# Altium PCB uStepper.PcbDoc (part 1 of 2)
Units mm, origin at the board's own origin, x right, y up, seen from the top; angles counter-clockwise.
Board outline 41.8 x 41.8 mm, 4 copper layers (Top Layer, GND, Vcc, Bottom Layer), stack 1.62 mm thick; 84 components, 62 nets, 292 pads, 387 vias.
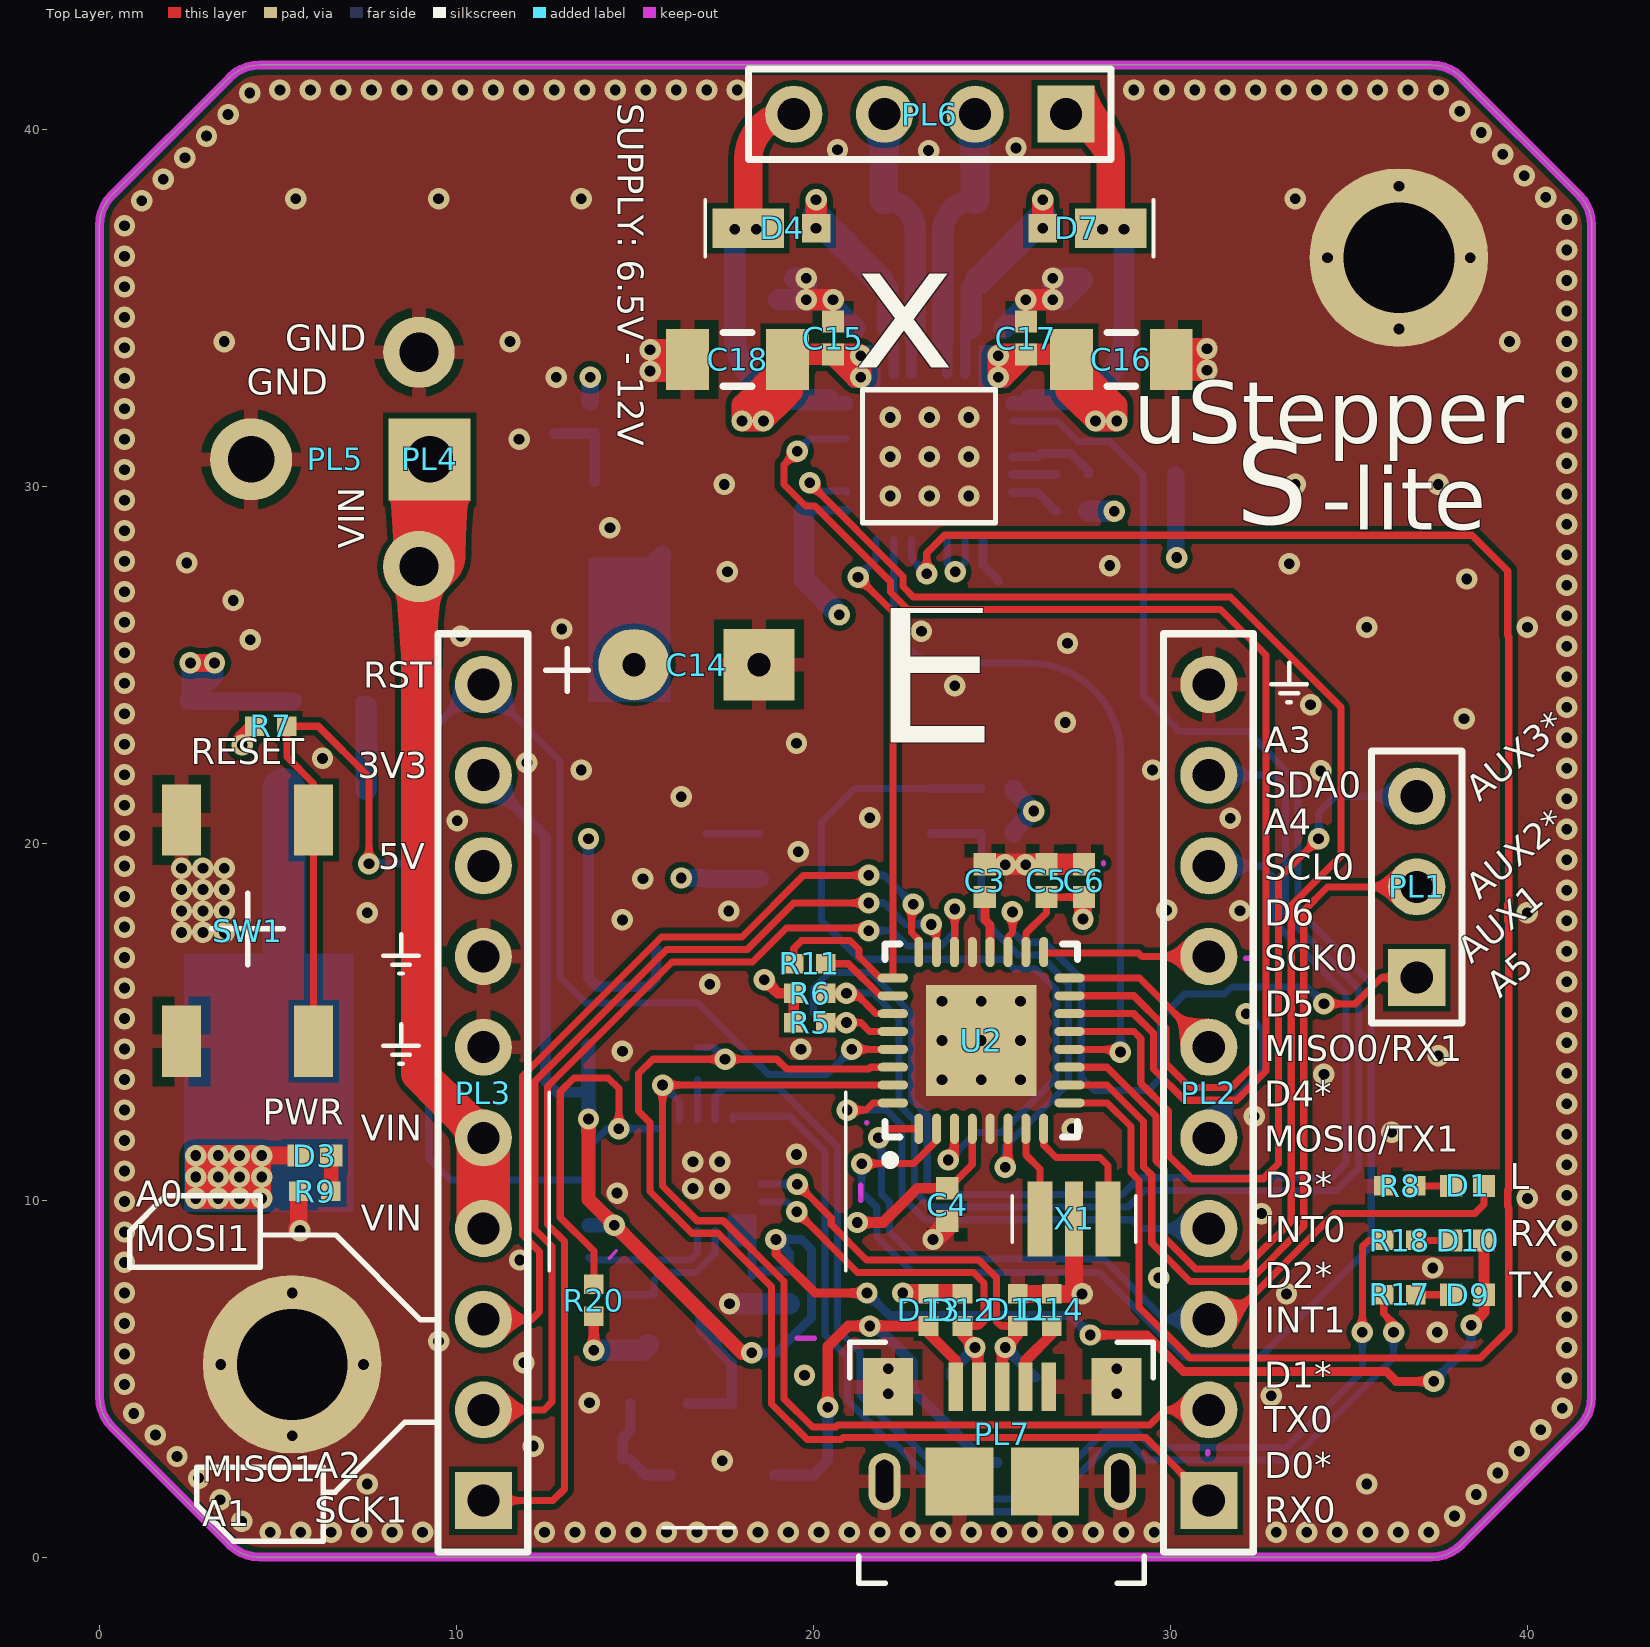
[diagram p0: Top Layer view]
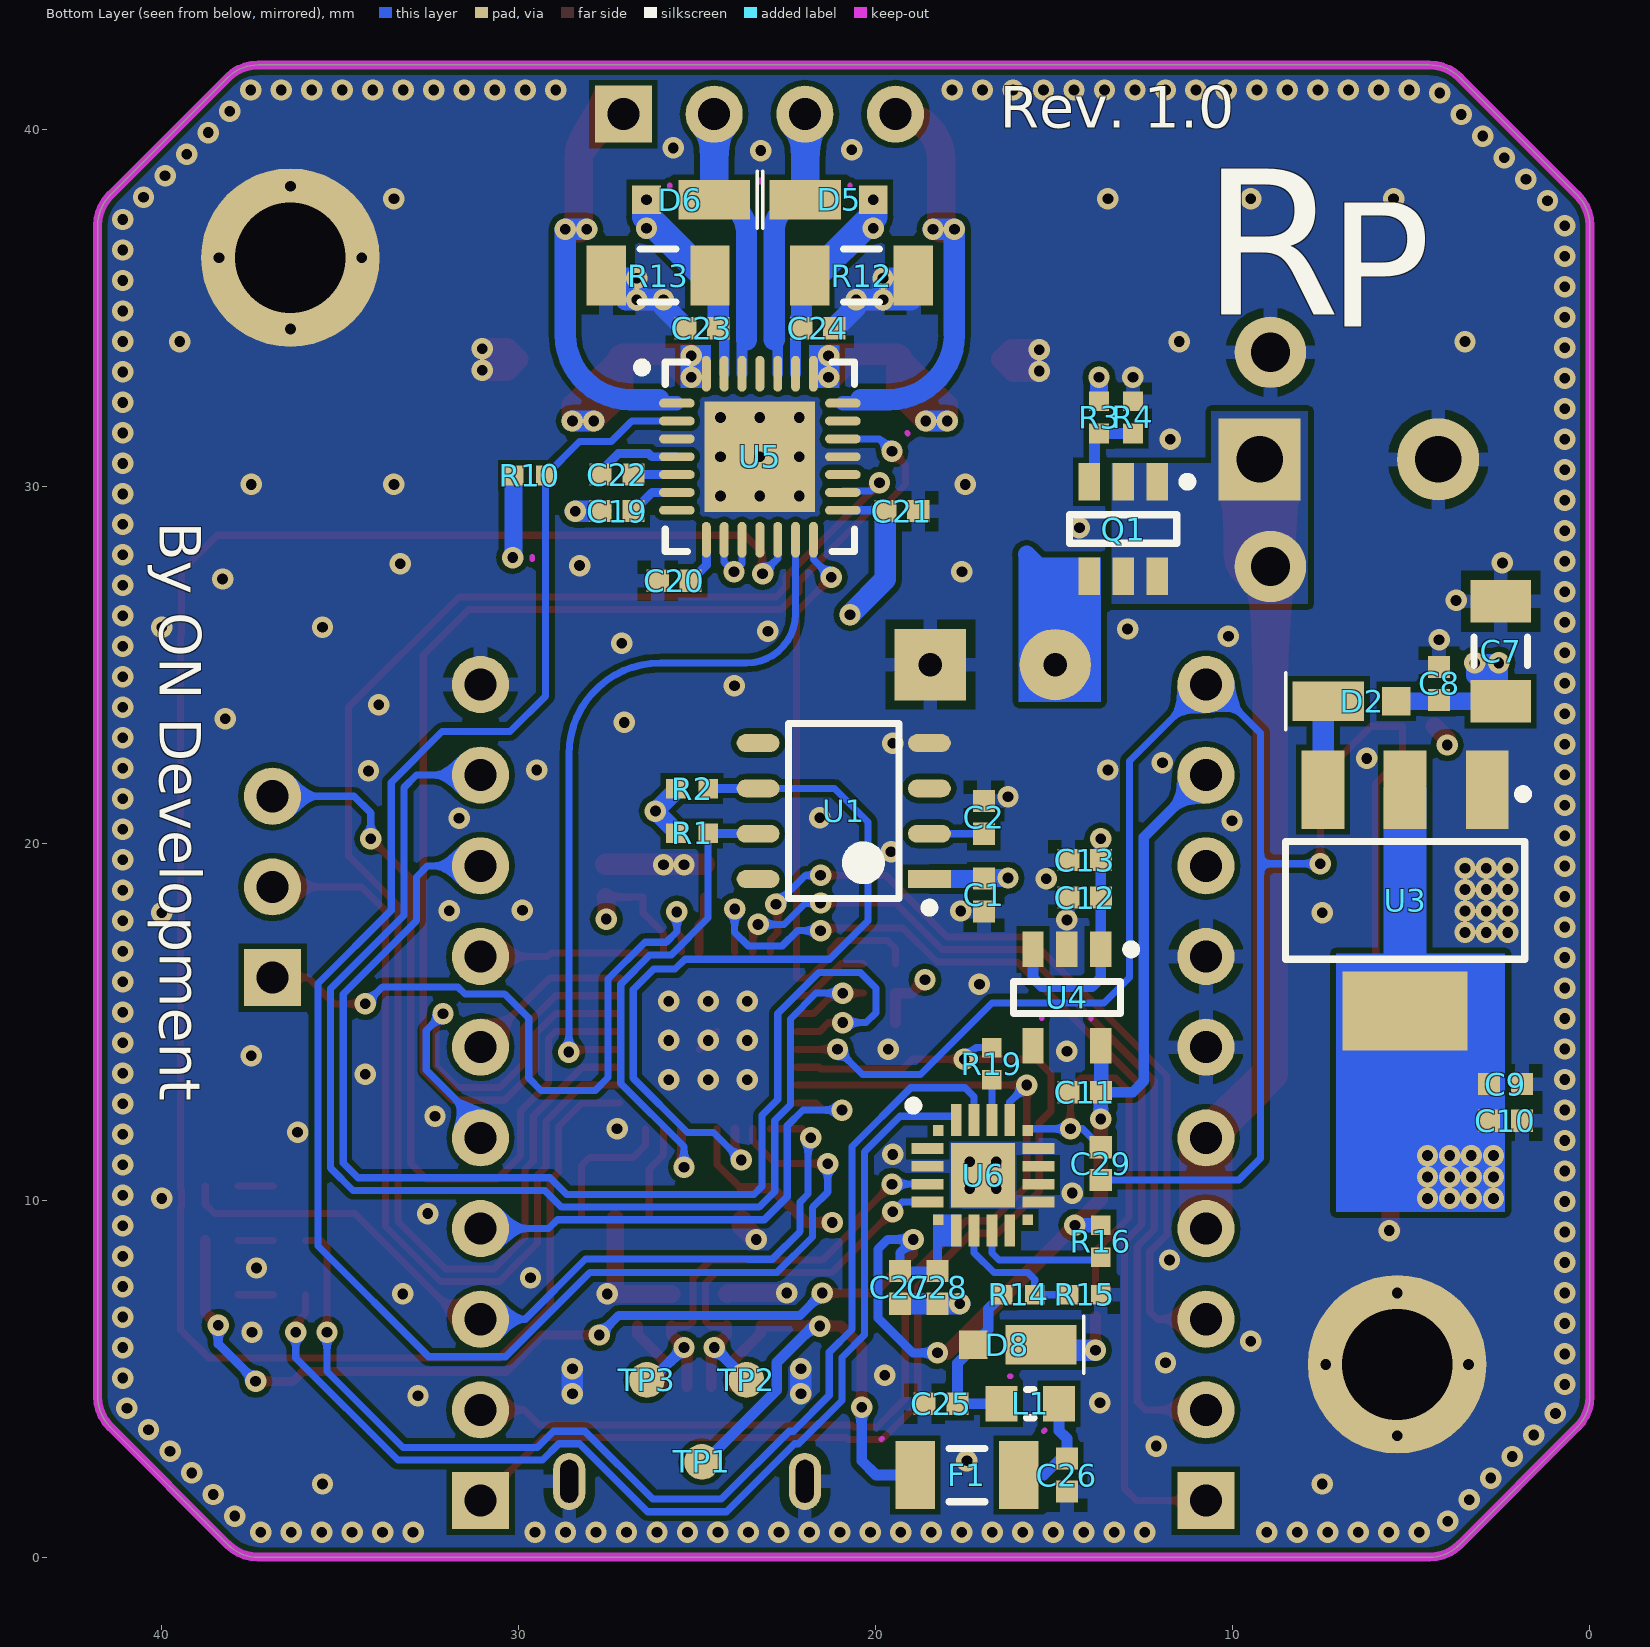
[diagram p1: Bottom Layer view, seen from below]
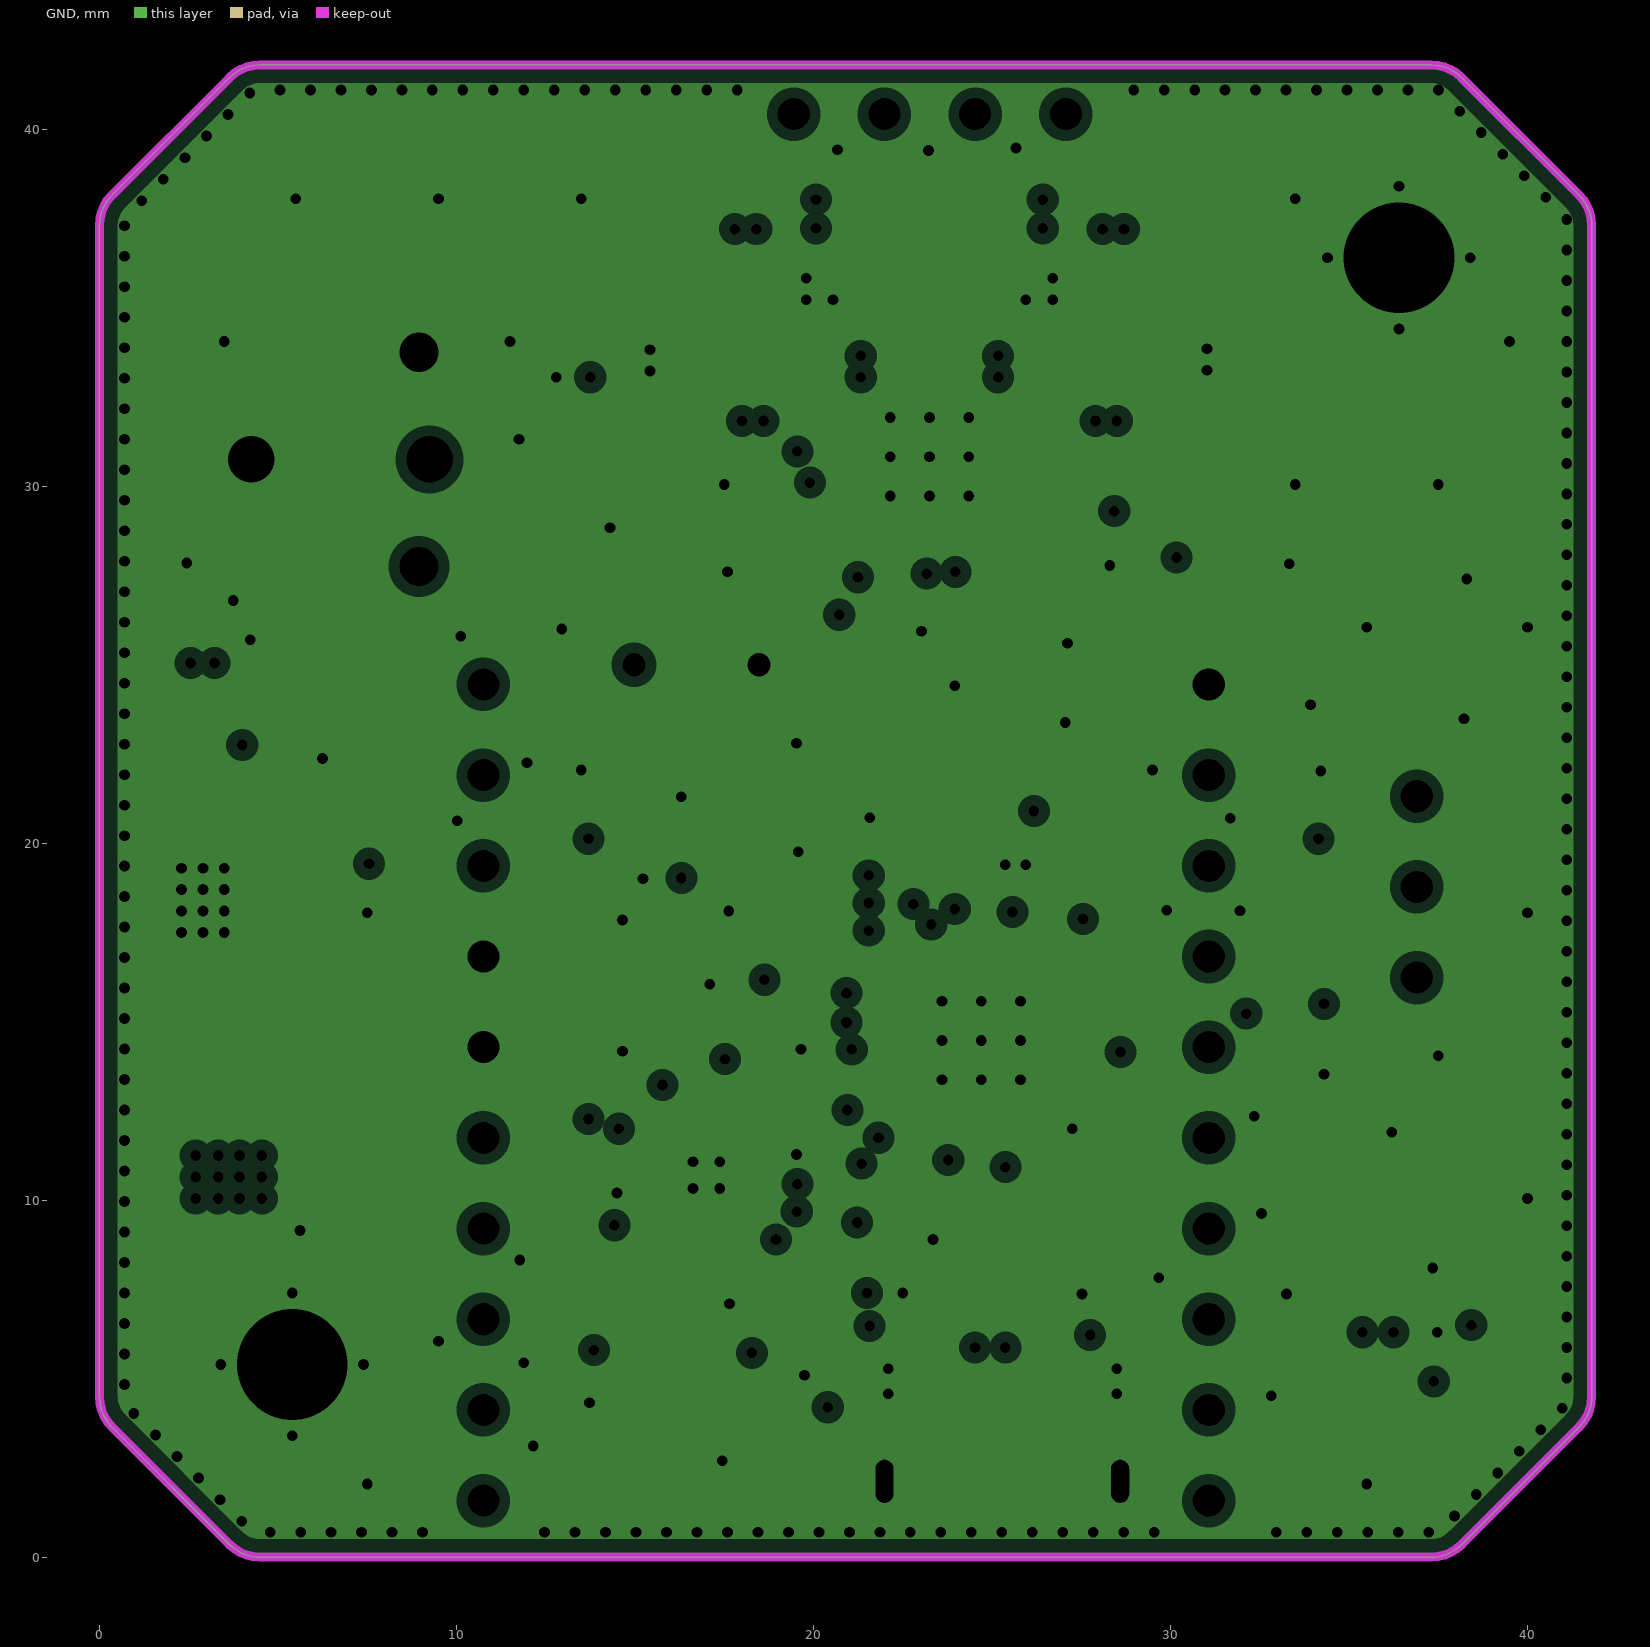
[diagram p2: GND, clearances drawn from the general rule]
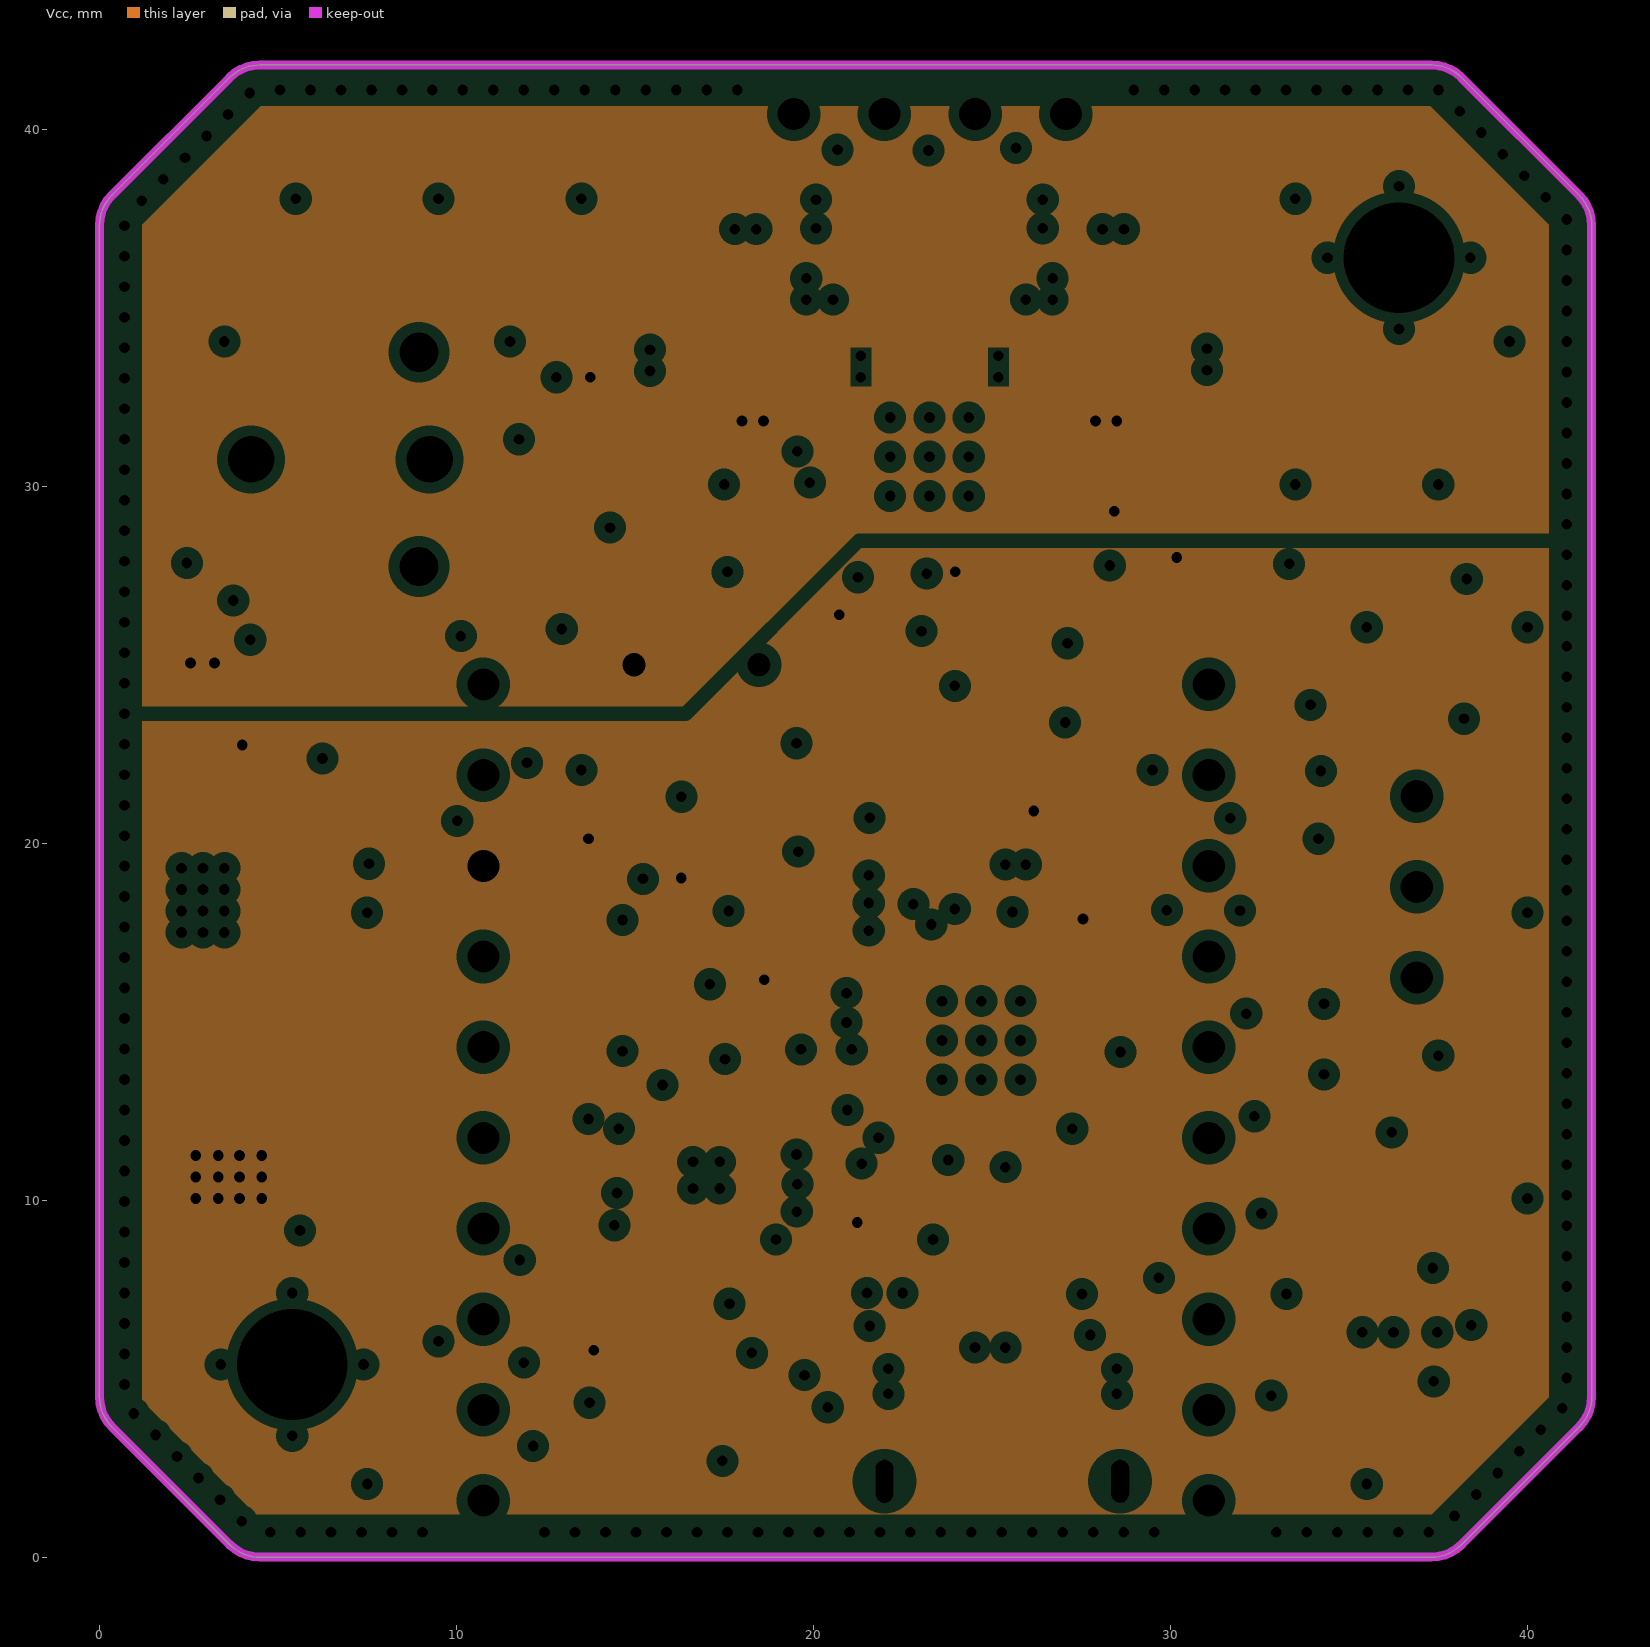
[diagram p3: Vcc, clearances drawn from the general rule]
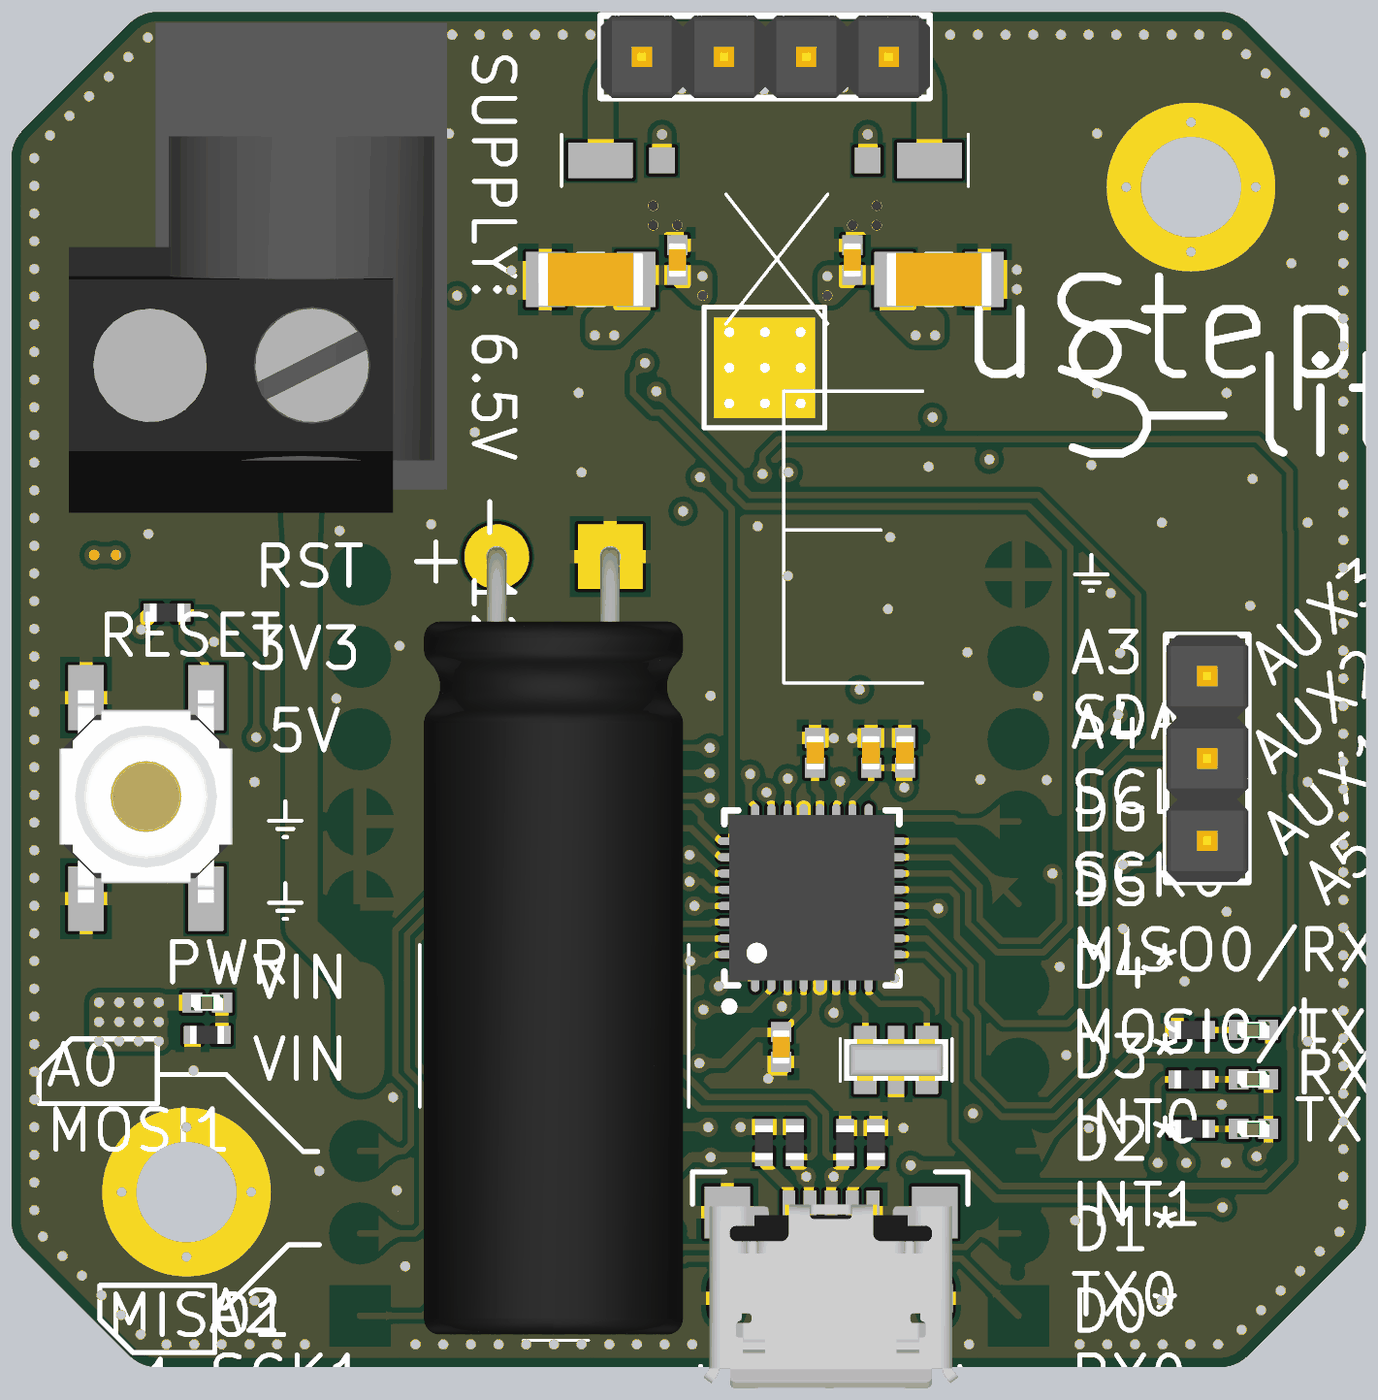
[diagram p5: 3D render of the assembled board from above, using the file's embedded part models]
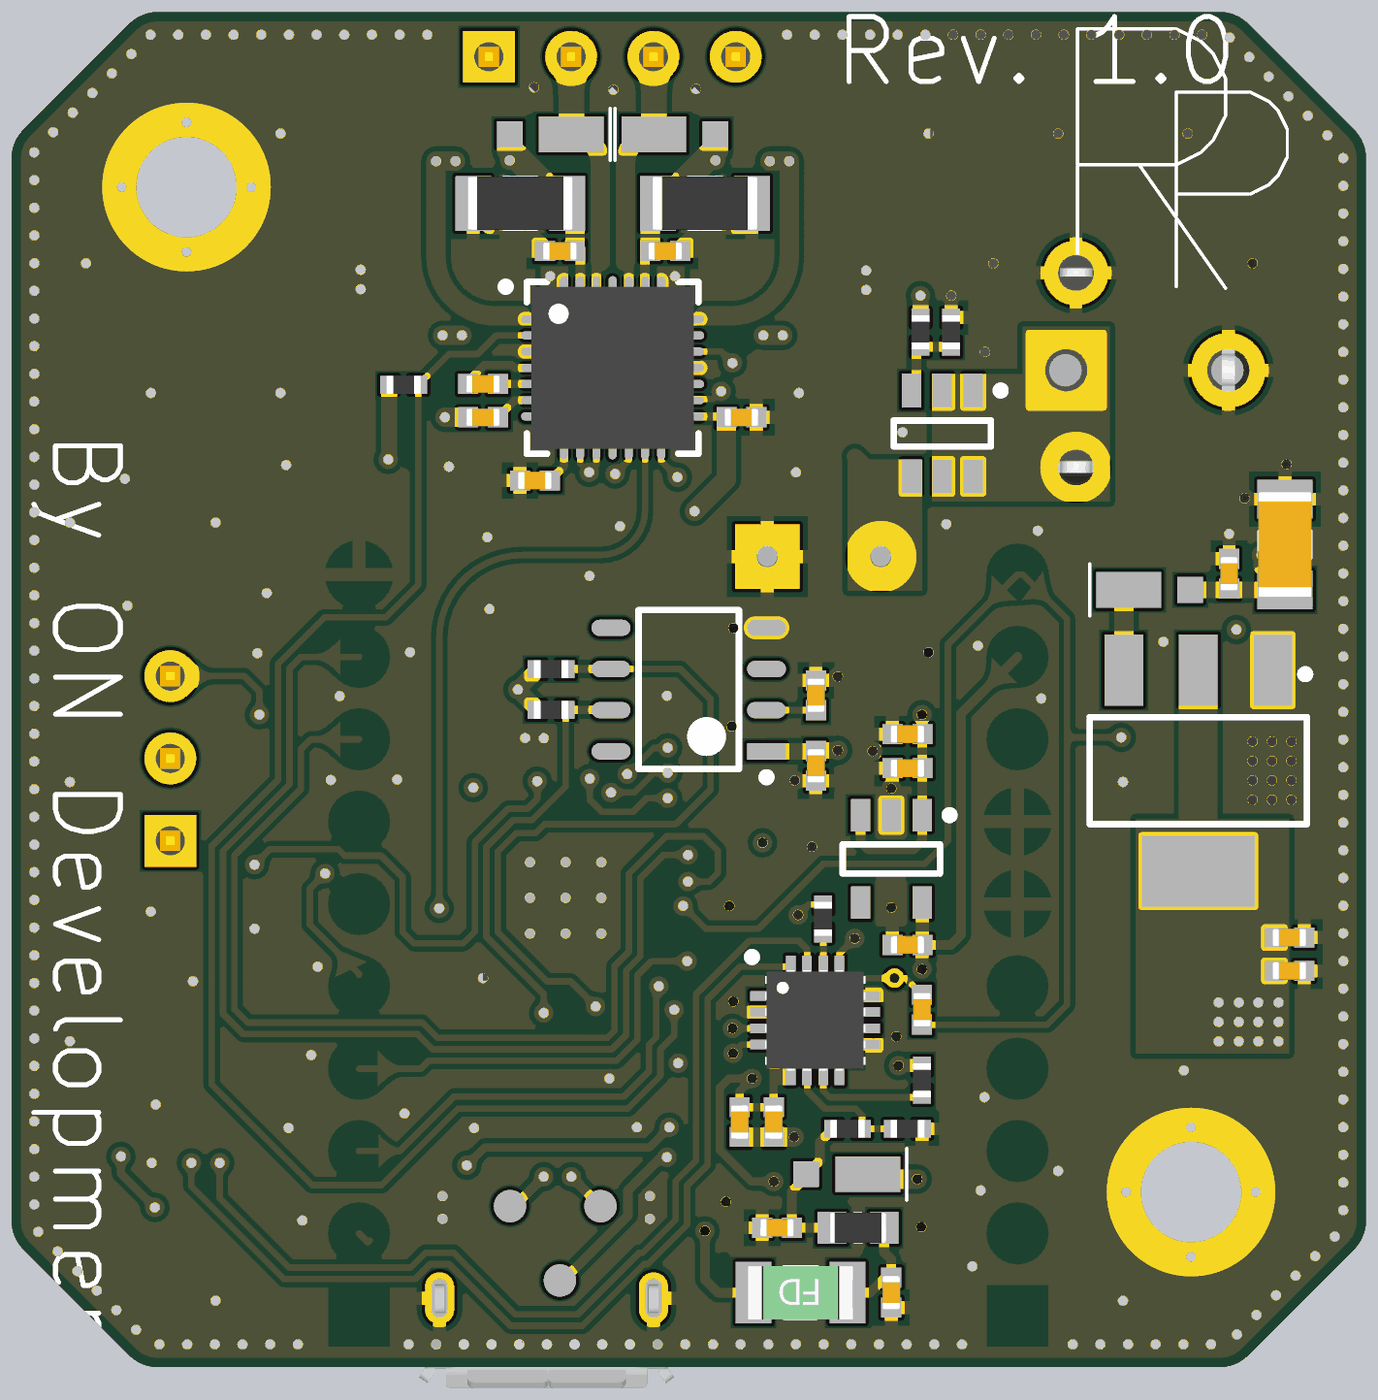
[diagram p6: 3D render of the assembled board from below, using the file's embedded part models]

## Layer stack, top to bottom
Top Solder: solder mask 0.01, Solder Resist, Dk 3.5
Top Layer: signal copper 0.035
Dielectric 1: prepreg 0.24, 2x2116, Dk 4.2
GND: plane copper 0.035, net GND
Dielectric 3: core 1, Dk 4.2
Vcc: plane copper 0.035, net (Multiple Nets)
Dielectric 4: prepreg 0.24, 2x2116, Dk 4.2
Bottom Layer: signal copper 0.035
Bottom Solder: solder mask 0.01, Solder Resist, Dk 3.5

## Board outline
0.349,3.65 3.651,0.348 ccw(c4.5,1.206) 4.494,-0.001 37.306,-0.001 ccw(c37.3,1.206) 38.149,0.348 41.451,3.65 ccw(c40.593,4.499) 41.8,4.499 41.8,37.299 ccw(c40.593,37.299) 41.446,38.153 38.154,41.446 ccw(c37.3,40.592) 37.3,41.799 4.5,41.799 ccw(c4.5,40.592) 3.646,41.446 0.354,38.153 ccw(c1.207,37.299) 0,37.299 0,4.499 ccw(c1.207,4.499)

## Design rules (kind name [scope] priority, off if disabled: settings)
AssemblyTestPointUsage SilkToBoardRegionClearance_1 [All] p2:
BoardOutlineClearance [All] p1: gap=0.25 ignorepadtopadclearanceinfootprint=FALSE
Clearance Board_edge [( OnLayer('Vcc') OR OnLayer('GND')) vs OnLayer('Keep-Out Layer')] p1: gap=0.25 ignorepadtopadclearanceinfootprint=FALSE
Clearance Clearance_Inner [(OnLayer('Vcc') OR OnLayer('GND'))] p2: gap=0.254 ignorepadtopadclearanceinfootprint=FALSE except(0: Arc-Hole Track-Hole SMDPad-Hole THPad-Hole Via-Hole Fill-Hole Poly-Hole Region-Hole Text-Hole)
Clearance [All] p3: gap=0.152 ignorepadtopadclearanceinfootprint=FALSE except(0: Arc-Hole Track-Hole SMDPad-Hole THPad-Hole Via-Hole Fill-Hole Poly-Hole Region-Hole Text-Hole)
ComponentClearance [All] p1: gap=-100 collisioncheckmode=3 verticalgap=0.254 showdistances=FALSE
DiffPairsRouting [All] p1: maxlimit=0.153 minlimit=0.153 mostfreqgap=0.153 toplayer_minwidth=0.2 toplayer_maxwidth=0.5 toplayer_prefwidth=0.275 bottomlayer_minwidth=0.2 bottomlayer_maxwidth=0.5 bottomlayer_prefwidth=0.275 maxuncoupledlength=12.7
HoleSize [All] p1: absolutevalues=TRUE maxlimit=6.35 minlimit=0.3 maxpercent=80.000 minpercent=20.000
MatchedLengths DiffPair_DIFF100MatchedLengths [InDifferentialPairClass('DIFF100')] p1: tolerance=0.152 checknetsindiffpair=TRUE checkdiffpairvsdiffpair=FALSE checkxsignals=FALSE checkothers=FALSE
MinimumAnnularRing MinimumAnnularRing_1 [All] p1: minimumring=0.145
MinimumSolderMaskSliver "SMT min Solder Mask Width" [All] p1 off: minsoldermaskwidth=0.13
PlaneClearance [All] p1: clearance=0.3
PlaneConnect Via [isVia] p1: planeconnectstyle=Direct reliefexpansion=0.508 reliefentries=4 reliefconductorwidth=0.254 reliefairgap=0.254
PlaneConnect VINPROTECT [InNet('VIN_PROTECT')] p2: planeconnectstyle=Relief reliefexpansion=0.508 reliefentries=4 reliefconductorwidth=0.5 reliefairgap=0.254
PlaneConnect [(InComponentClass('All Components'))] p3: planeconnectstyle=Relief reliefexpansion=0.508 reliefentries=4 reliefconductorwidth=0.5 reliefairgap=0.254
PlaneConnect "Corner pads" [All] p4: planeconnectstyle=Direct reliefexpansion=0.508 reliefentries=4 reliefconductorwidth=0.254 reliefairgap=0.254
PolygonConnect PolygonConnect_VIN [InNet('VIN')] p1: thpad.connectstyle=Direct thpad.reliefconductorwidth=1.75 thpad.reliefentries=4 thpad.polygonreliefangle="90 Angle" thpad.airgapwidth=0.35 smdpad.connectstyle=Direct smdpad.reliefconductorwidth=0.254 smdpad.reliefentries=4 smdpad.polygonreliefangle="90 Angle" smdpad.airgapwidth=0.254 via.connectstyle=Relief via.reliefconductorwidth=0.254 via.reliefentries=4 via.polygonreliefangle="90 Angle" via.airgapwidth=0.254
PolygonConnect PolygonConnect_IC [(InComponent('U1') OR InComponent('U2') OR InComponent('U3') OR InComponent('U4') OR InComponent('U5') OR InComponent('U6'))] p2: connectstyle=Direct reliefconductorwidth=0.254 reliefentries=4 polygonreliefangle="90 Angle" airgapwidth=0.254
PolygonConnect PolygonConnect_Via [IsVia] p3: connectstyle=Direct reliefconductorwidth=0.254 reliefentries=4 polygonreliefangle="90 Angle" airgapwidth=0.254
PolygonConnect [(InComponentClass('All Components'))] p4: connectstyle=Relief reliefconductorwidth=0.4 reliefentries=4 polygonreliefangle="90 Angle" airgapwidth=0.254
PolygonConnect "GND corner pads" [All] p5: connectstyle=Direct reliefconductorwidth=0.254 reliefentries=4 polygonreliefangle="90 Angle" airgapwidth=0.254
RoutingVias [All] p1: holewidth=0.3 width=0.6 viastyle="Through Hole" minholewidth=0.3 minwidth=0.4 maxholewidth=5 maxwidth=10
SilkToBoardRegionClearance SilkToBoardRegionClearance_1_1 [All] p1:
SilkToBoardRegionClearance [All] p2:
SilkToSilkClearance [All] p1 off: silktosilkclearance=0.254
SilkToSolderMaskClearance SilkToSolderMaskClearance_1_1 [IsPad] p1: minsilkscreentomaskgap=0.178 clearancetoexposedcopper=TRUE
SolderMaskExpansion [All] p1: expansion=0.102
Width [All] p1: maxlimit=2.54 minlimit=0.152 preferedwidth=0.2
21 further rules are at their usual default settings.

## Classes and differential pairs
component class U_USB: C25 C26 C27 C28 C29 D8 D9 D10 D11 D12 D13 D14 F1 L1 LD2 LD3 PL7 R14 R15 R16 R17 R18 R19 R20 TP1 TP2 TP3 U6
component class U_Stepper_control: C14 C15 C16 C17 C18 C19 C20 C21 C22 C23 C24 C? D4 D5 D6 D7 PL6 R10 R11 R12 R13 U5
component class U_Power: C7 C8 C9 C10 C11 C12 C13 D2 D3 LD4 R9 U3 U4
component class U_MCU+IO: C3 C4 C5 C6 D1 LD1 R5 R6 R7 R8 SW1 U2 X1
component class U_encoder: C1 C2 R1 R2 U1
component class Main: PL1 PL2 PL3 PL4 PL5 Q1 R3 R4
differential pair USB: +USB_P -USB_N

## Components (designator, comment, footprint, x,y, rotation, side; value= is the part's Value field where it differs from the comment)
C1 "0.1 uF 0402 25V" CAP_0402 16.975,18.549 r90 bottom value="0.1 uF"
C2 "1uF 0402 10V" CAP_0402 16.975,20.724 r270 bottom value="1 uF"
C3 "0.1 uF 0402 25V" CAP_0402 24.8,18.949 r270 top value="0.1 uF"
C4 "0.1 uF 0402 25V" CAP_0402 23.75,9.874 r270 top value="0.1 uF"
C5 "0.1 uF 0402 25V" CAP_0402 26.525,18.949 r270 top value="0.1 uF"
C6 "1uF 0402 10V" CAP_0402 27.575,18.95 r270 top value="1 uF"
C7 "10uF 1206 50V" CAP_1206 2.5,25.374 r270 bottom value=10uF
C8 "0.1 uF 0402 25V" CAP_0402 4.225,24.474 r270 bottom value="0.1 uF"
C9 "0.1 uF 0402 25V" CAP_0402 2.365,13.249 r0 bottom value="0.1 uF"
C10 "10uF 0402 6V3" CAP_0402 2.365,12.224 r0 bottom value=10uF
C11 "1uF 0402 10V" CAP_0402 14.15,13.024 r180 bottom value="1 uF"
C12 "0.1 uF 0402 25V" CAP_0402 14.15,18.474 r180 bottom value="0.1 uF"
C13 "1uF 0402 10V" CAP_0402 14.15,19.524 r180 bottom value="1 uF"
C14 "180uF 50V" "Capacitor 8x22" 16.725,24.999 r180 top locked value=180uF
C15 "0.1 uF 0402 25V" CAP_0402 20.55,34.149 r270 top value="0.1 uF"
C16 "10uF 1206 50V" CAP_1206 28.625,33.549 r0 top value=10uF
C17 "0.1 uF 0402 25V" CAP_0402 25.95,34.149 r270 top value="0.1 uF"
C18 "10uF 1206 50V" CAP_1206 17.875,33.549 r180 top value=10uF
C19 "0.1 uF 0402 25V" CAP_0402 27.25,29.299 r180 bottom value="0.1 uF"
C20 "10uF 0402 6V3" CAP_0402 25.65,27.349 r180 bottom value=10uF
C21 "0.1 uF 0402 25V" CAP_0402 19.275,29.299 r0 bottom value="0.1 uF"
C22 "22nF 0402 50V" CAP_0402 27.25,30.324 r180 bottom value=22nF
C23 "0.1 uF 0402 25V" CAP_0402 24.875,34.424 r180 bottom value="0.1 uF"
C24 "0.1 uF 0402 25V" CAP_0402 21.625,34.424 r0 bottom value="0.1 uF"
C25 "10uF 0402 6V3" CAP_0402 18.175,4.299 r180 bottom value=10uF
C26 "0.1 uF 0402 25V" CAP_0402 14.65,2.299 r90 bottom value="0.1 uF"
C27 "10uF 0402 6V3" CAP_0402 19.327,7.559 r90 bottom value=10uF
C28 "0.1 uF 0402 25V" CAP_0402 18.277,7.559 r90 bottom value="0.1 uF"
C29 "0.1 uF 0402 25V" CAP_0402 13.7,11.024 r270 bottom value="0.1 uF"
D1 "GREEN LED" "0402 LED" 38.325,10.399 r180 top
D2 "V2P6-M3/H" MicroSMP 6.725,23.974 r180 bottom
D3 "GREEN LED" "0402 LED" 6.035,11.249 r0 top
D4 "V2P6-M3/H" MicroSMP 18.775,37.224 r0 top
D5 "V2P6-M3/H" MicroSMP 21.375,38.024 r180 bottom
D6 "V2P6-M3/H" MicroSMP 25.125,38.024 r0 bottom
D7 "V2P6-M3/H" MicroSMP 27.725,37.224 r180 top
D8 "V2P6-M3/H" MicroSMP 15.975,5.949 r0 bottom
D9 "GREEN LED" "0402 LED" 38.325,7.349 r180 top
D10 "GREEN LED" "0402 LED" 38.325,8.874 r180 top
D11 "TVS" RES_0402 25.725,6.924 r270 top
D12 "TVS" RES_0402 24.175,6.924 r270 top
D13 "TVS" RES_0402 23.225,6.924 r270 top
D14 "TVS" RES_0402 26.675,6.924 r270 top
F1 "PTC 250mA Hold" "PTC Fuse 1206" 17.45,2.299 r0 bottom
L1 "180 Ohms @ 100MHz" IND_0603 15.675,4.299 r180 bottom value="180 Ohm"
PL1 "3-pin 2.54mm" "3-pin 2.54mm header" 36.9,18.774 r90 top locked
PL2 "2.54mm" "10-pin female 2.54mm" 35.52,-7.559 r90 top locked
PL3 "2.54mm" "10-pin female 2.54mm" 15.2,-7.559 r90 top locked
PL4 "2pin Terminal block 5.08mm" "5mm header" 6.75,30.749 r180 top
PL5 "PJ-102AH" PJ-102AH 6.6,30.749 r270 top locked
PL6 "2.54mm" "4-pin 2.54mm header" 23.26,40.419 r180 top locked
PL7 "Micro USB" "10118193-0001LF Micro USB" 25.29,3.449 r0 top locked
Q1 "CPH6354" SOT95P280X95-6N 13.075,28.799 r270 bottom
R1 "4k7 0402" RES_0402 25.15,20.274 r0 bottom value=4k7
R2 "4k7 0402" RES_0402 25.15,21.524 r0 bottom value=4k7
R3 "10k 0402" RES_0402 13.75,31.924 r90 bottom value=10k
R4 "4k7 0402" RES_0402 12.8,31.924 r270 bottom value=4k7
R5 "4k7 0402" RES_0402 19.9,14.974 r180 top value=4k7
R6 "4k7 0402" RES_0402 19.9,15.799 r180 top value=4k7
R7 "10k 0402" RES_0402 4.8,23.274 r180 top value=10k
R8 "47k 0402" RES_0402 36.425,10.399 r0 top value=47k
R9 "47k 0402" RES_0402 6.035,10.249 r0 top value=47k
R10 "10k 0402" RES_0402 29.7,30.299 r0 bottom value=10k
R11 "1k 0402" RES_0402 19.9,16.624 r0 top value=1k
R12 "0R15" RES_1206 20.4,35.899 r0 bottom
R13 "0R15" RES_1206 26.1,35.899 r180 bottom
R14 "22k 0402" RES_0402 16,7.349 r0 bottom value=22k
R15 "47k 0402" RES_0402 14.15,7.349 r0 bottom value=47k
R16 "1k 0402" RES_0402 13.7,8.849 r90 bottom value=1k
R17 "47k 0402" RES_0402 36.425,7.349 r180 top value=47k
R18 "47k 0402" RES_0402 36.425,8.874 r180 top value=47k
R19 "4k7 0402" RES_0402 16.75,13.824 r90 bottom value=4k7
R20 "10k 0402" RES_0402 13.85,7.199 r270 top value=10k
SW1 "TACTB-64K-F" TACTB-64K-F 4.15,17.549 r270 top
TP1 "TestPoint" 1x0mm 24.877,2.673 r90 bottom locked
TP2 "TestPoint" 1x0mm 23.625,4.965 r90 bottom locked
TP3 "TestPoint" 1x0mm 26.416,4.965 r90 bottom locked
U1 "AS5600" AS5600_SOIC8 20.9,20.899 r0 bottom locked
U2 "ATmega328PB" QFN50P500X500X90_HS-33N 24.7,14.474 r90 top locked
U3 "AZ1117CH-5.0TRG1" SOT230P700X180-4N 5.175,18.399 r270 bottom
U4 "MIC5504-3.3YM5-TR" SOT95P280X130-5N 14.65,15.675 r270 bottom
U5 "TMC2208" QFN50P500X500X90_HS-29N 23.25,30.824 r180 bottom locked
U6 "CP2102N" QFN50P300X300X80_HS-21N 17,10.699 r180 bottom
X1 "16 MHz" CSTCE16XTAL 27.3,9.474 r0 top

## Footprints (in the part's own frame and the unit in brackets; to place one, negate y for a bottom-side part, rotate by r counter-clockwise, add the part's x,y. Pads: shape width x height; smd on the part's side, far side on the other; paste and mask are expansions set on the pad)
1x0mm [mm] "Testpoint with 1mm pad and no hole"
  round 1 smd: 1(0,0)
"3-pin 2.54mm header" [mm]
  rect 1.6x1.6 hole 0.9: 1(-2.54,0)
  round 1.6 hole 0.9: 2(0,0) 3(2.54,0)
  silkscreen extent -3.81,-1.27 3.81,1.27, body extent -3.81,-1.27 3.81,1.27, height 9.5
"4-pin 2.54mm header" [mm]
  rect 1.6x1.6 hole 0.9: 1(-3.81,0)
  round 1.6 hole 0.9: 2(-1.27,0) 3(1.27,0) 4(3.81,0)
  silkscreen extent -5.08,-1.27 5.08,1.27, body extent -5.08,-1.27 5.08,1.27, height 9.5
"5mm header" [mm] "Screw terminal 2-way"
  rect 2.3x2.3 hole 1.3: 1(-2.5,0)
  body extent -5.57,-3.8 4.97,4.4, height 10
"10-pin female 2.54mm" [mm]
  rect 1.6x1.6 hole 0.9: 1(9.144,4.445)
  round 1.6 hole 0.9: 2(11.684,4.445) 3(14.224,4.445) 4(16.764,4.445) 5(19.304,4.445) 6(21.844,4.445) 7(24.384,4.445) 8(26.924,4.445) 9(29.464,4.445) 10(32.004,4.445)
  silkscreen extent 7.7,3.2 33.43,5.72, body extent 7.6,3.23 33.51,5.7, height 8.61
"0402 LED" [mm]
  rect 0.62x0.62 smd: 1(-0.46,0) 2(0.46,0)
  body extent -0.5,-0.25 0.5,0.25, height 0.16
"10118193-0001LF Micro USB" [mm] "CONN USB MICRO B RECPT SMT R/A"
  rect 0.4x1.35 smd: 1(-1.3,1.325) 2(-0.65,1.325) 3(0,1.325) 4(0.65,1.325) 5(1.3,1.325)
  rect 1.4x1.6 smd: 6(-3.2,1.325) 7(3.2,1.325)
  rect 1.9x1.9 smd: 8(1.2,-1.325) 9(-1.2,-1.325)
  oval 0.9x1.6 hole 0.5 slot 1.2 at 90 deg: 10(3.3,-1.325) 11(-3.3,-1.325)
  silkscreen extent -4.27,-4.17 4.23,2.58, body extent -3.93,-4.1 3.93,1.56, height 2.78
AS5600_SOIC8 [mm] "AS5600"
  rect 1.2x0.5 smd: 1(-2.4,1.905)
  oval 1.2x0.5 smd: 2(-2.4,0.635) 3(-2.4,-0.635) 4(-2.4,-1.905) 5(2.4,-1.905) 6(2.4,-0.635) 7(2.4,0.635) 8(2.4,1.905)
  silkscreen extent -2.52,-2.45 1.55,2.83, body extent -1.95,-2.45 1.95,2.45, height 1.75
CAP_0402 [mm] "Chip Capacitor, 2-Leads, 0402, IPC Medium Density"
  rect 0.62x0.62 smd: 1(-0.46,0) 2(0.46,0)
  body extent -0.53,-0.28 0.53,0.28, height 0.4
CAP_1206 [mm] "Chip Capacitor, 2-Leads, 1206, IPC Medium Density"
  rect 1.2x1.7 smd: 1(-1.4,0) 2(1.4,0)
  silkscreen extent -0.4,-0.75 0.4,0.75, body extent -1.63,-0.82 1.63,0.82, height 0.7
"Capacitor 8x22" [mm]
  round 2 hole 0.65: 1(1.75,0)
  rect 2x2 hole 0.65: 2(-1.75,0)
  silkscreen extent -4.18,11.98 4.13,24.18, body extent -4,-0.3 4,24, height 8.1
CSTCE16XTAL [mm] "CSTCE16M0V53-R0"
  rect 0.7x2.1 smd: 1(-0.95,0) 3(0.95,0)
  rect 0.5x2.1 smd: 2(0,0)
  silkscreen extent -1.73,-0.65 1.73,0.65, body extent -1.6,-0.65 1.6,0.65, height 0.7
IND_0603 [mm] "Chip Inductor, 2-Leads, 0603, IPC Medium Density"
  rect 0.89x0.99 smd: 1(-0.805,0) 2(0.805,0)
  silkscreen extent -0.1,-0.4 0.1,0.4, body extent -0.87,-0.48 0.87,0.48, height 0.55
MicroSMP [mm] "MicroSMP, 2-Leads, Body 1,30x2,50mm, IPC Medium Density"
  rect 0.8x0.8 smd: 1(1.3,0)
  rect 2x1.1 smd: 2(-0.6,0)
  silkscreen extent -1.8,-0.8 -1.8,0.8, body extent -1.15,-0.7 1.15,0.7, height 0.73
PJ-102AH [mm]
  round 2 hole 1.1: 1(3,2.35)
  round 2 hole 1.1 mask+0.102: 2(-3,2.35)
  round 2.3 hole 1.3: 3(0,-2.35)
  body extent -10.72,-2.55 3.68,6.85, height 3
"PTC Fuse 1206" [mm]
  rect 1.1x1.9 smd: 1(-1.45,0) 2(1.45,0)
  silkscreen extent -0.5,-0.74 0.5,0.74, body extent -1.62,-0.82 1.63,0.83, height 0.4
QFN50P300X300X80_HS-21N [mm] "QFN, 20-Leads, Body 3,00x3,00mm, Pitch 0,50mm, Thermal Pad 1,70x1,70mm, IPC Medium Density"
  rect 0.3x0.3 smd: 1(-1.25,1.25) 6(-1.25,-1.25) 11(1.25,-1.25) 16(1.25,1.25)
  rect 0.9x0.3 smd: 2(-1.55,0.75) 3(-1.55,0.25) 4(-1.55,-0.25) 5(-1.55,-0.75) 12(1.55,-0.75) 13(1.55,-0.25) 14(1.55,0.25) 15(1.55,0.75)
  rect 0.3x0.9 smd: 7(-0.75,-1.55) 8(-0.25,-1.55) 9(0.25,-1.55) 10(0.75,-1.55) 17(0.75,1.55) 18(0.25,1.55) 19(-0.25,1.55) 20(-0.75,1.55)
  rect 1.8x1.8 smd: 21(0,0)
  silkscreen extent -2.07,1.83 -1.83,2.07, body extent -1.55,-1.55 1.55,1.55, height 0.8
QFN50P500X500X90_HS-29N [mm] "QFN, 28-Leads, Body 5,00x5,00mm, Pitch 0,50mm, Thermal Pad 3,10x3,10mm, IPC Medium Density"
  oval 1x0.25 smd: 1(-2.325,1.5) 2(-2.325,1) 3(-2.325,0.5) 4(-2.325,0) 5(-2.325,-0.5) 6(-2.325,-1) 7(-2.325,-1.5) 15(2.325,-1.5) 16(2.325,-1) 17(2.325,-0.5) 18(2.325,0) 19(2.325,0.5) 20(2.325,1) 21(2.325,1.5)
  oval 0.25x1 smd: 8(-1.5,-2.325) 9(-1,-2.325) 10(-0.5,-2.325) 11(0,-2.325) 12(0.5,-2.325) 13(1,-2.325) 14(1.5,-2.325) 22(1.5,2.325) 23(1,2.325) 24(0.5,2.325) 25(0,2.325) 26(-0.5,2.325) 27(-1,2.325) 28(-1.5,2.325)
  rect 3.1x3.1 smd: 29(0,0)
  silkscreen extent -3.42,-2.65 2.65,2.65, body extent -2.5,-2.5 2.5,2.5, height 0.9
QFN50P500X500X90_HS-33N [mm] "QFN, 32-Leads, Body 5,00x5,00mm, Pitch 0,50mm, Thermal Pad 3,10x3,10mm, IPC Medium Density"
  oval 0.85x0.25 smd: 1(-2.475,1.75) 2(-2.475,1.25) 3(-2.475,0.75) 4(-2.475,0.25) 5(-2.475,-0.25) 6(-2.475,-0.75) 7(-2.475,-1.25) 8(-2.475,-1.75) 17(2.475,-1.75) 18(2.475,-1.25) 19(2.475,-0.75) 20(2.475,-0.25) 21(2.475,0.25) 22(2.475,0.75) 23(2.475,1.25) 24(2.475,1.75)
  oval 0.25x0.85 smd: 9(-1.75,-2.475) 10(-1.25,-2.475) 11(-0.75,-2.475) 12(-0.25,-2.475) 13(0.25,-2.475) 14(0.75,-2.475) 15(1.25,-2.475) 16(1.75,-2.475) 25(1.75,2.475) 26(1.25,2.475) 27(0.75,2.475) 28(0.25,2.475) 29(-0.25,2.475) 30(-0.75,2.475) 31(-1.25,2.475) 32(-1.75,2.475)
  rect 3.1x3.1 smd: 33(0,0)
  silkscreen extent -3.47,-2.7 2.7,2.7, body extent -2.55,-2.55 2.55,2.55, height 0.9
RES_0402 [mm] "Chip Resistor, 2-Leads, 0402, IPC Medium Density"
  rect 0.55x0.55 smd: 1(-0.45,0) 2(0.45,0)
  body extent -0.52,-0.27 0.53,0.28, height 0.4
RES_1206 [mm] "Chip Resistor, 2-Leads, 1206, IPC Medium Density"
  rect 1.1x1.69 smd: 1(-1.45,0) 2(1.45,0)
  silkscreen extent -0.5,-0.74 0.5,0.74, body extent -1.63,-0.82 1.63,0.82, height 0.7
SOT95P280X95-6N [mm] "SOT23, 6-Leads, Body 2,90x2,80mm, Pitch 0,95mm, IPC Medium Density"
  rect 1.05x0.6 smd: 1(-1.325,0.95) 2(-1.325,0) 3(-1.325,-0.95) 4(1.325,-0.95) 5(1.325,0) 6(1.325,0.95)
  silkscreen extent -1.45,-1.5 0.4,1.92, body extent -0.8,-1.5 0.8,1.5, height 0.95
SOT95P280X130-5N [mm] "SOT23, 5-Leads, Body 2,90x2,80mm, Pitch 0,95mm, IPC Medium Density"
  rect 1x0.6 smd: 1(-1.35,0.95) 2(-1.35,0) 3(-1.35,-0.95) 4(1.35,-0.95) 5(1.35,0.95)
  silkscreen extent -1.47,-1.5 0.45,1.92, body extent -0.85,-1.5 0.85,1.5, height 1.3
SOT230P700X180-4N [mm] "SOT223, 4-Leads, Body 6,50x7,00mm (avg), Pitch 2,30mm, IPC Medium Density"
  rect 2.2x1.2 smd: 1(-3.1,2.3) 2(-3.1,0) 3(-3.1,-2.3)
  rect 2.2x3.5 smd: 2(3.1,0)
  silkscreen extent -3.1,-3.35 1.65,3.42, body extent -1.85,-3.35 1.85,3.35, height 1.8
TACTB-64K-F [mm] "Tactile switch"
  rect 2x1.1 smd: 1(-3.1,1.85) 2(3.1,1.85) 3(-3.1,-1.85) 4(3.1,-1.85)
  silkscreen extent -1.05,-1 0.95,1, body extent -3.32,-2.67 3.23,2.68, height 1.6

## Part data
C1 C3 C4 C5 C8 C9 C12 C15 C17 C19 C21 C23 C24 C26 C28 C29: library part CMP-00061-4, "0.1UF 25V 10% X5R 0402", Mfg. Part Number=TMK105BJ104KV-F, Tolerance=10%, Voltage=25V
C2 C6 C11 C13: library part CMP-00032-4, "1uF 0402 10V 10% X5R", Tolerance="10 %", Voltage="10 V"
C7 C16 C18: library part CMP-00030-4, "10uF 1206 50V X5R 20%", Tolerance="+/- 20%", Voltage="50 V"
C10 C20 C25 C27: library part CMP-00011-3, "10uF 20% 0402 6V3 X6S", Current Rating=-, Tolerance=20%, Voltage=6V3
C14: library part CMP-002-0003-2, "180UF 20% 50V 105DEG RADIAL", Case/Package=-, Tolerance=20%
C22: library part CMP-00045-4, "22nF 0402 50V X7R 10%", Mfg. Part Number=885012205063, Tolerance=10%, Voltage=50V
D1 D3 D9 D10: library part CMP-008-0001-2, "0402 SMD LED", Mfg. Part Number=LTST-C281KGKT
D2 D4 D5 D6 D7 D8: library part CMP-016-0002-2, "DIODE SCHOTTKY 60V 2A MICROSMP"
D11 D12 D13 D14: library part CMP-016-0004-2, "TVS DIODE 12VC 8A IPP 0402", Mfg. Part Number=GG040205100N2P
F1: library part CMP-017-0000-3, "PTC RESET FUSE 24V 250MA 1206", Case/Package=1206, Mfg. Part Number=0ZCJ0025AF2E, Mount=SMD, Pins=2, RoHS=Yes
L1: library part CMP-ROOT-0005-2, "FERRITE BEAD 180 OHM 0603 1LN", Case/Package=0603, Current=1.5A, Mfg. Part Number=BLM18PG181SN1D
PL1: library part CMP-003-0018-1, "Pin header 3-pin 2.54mm male", Mfg. Part Number=DS1021-1*3SF1-1, Cat=Connectors, DynamicData="Ningbo Connfly Electric DS1021-1*3SF1-1", FootprintName1="3-pin 2.54mm header", FootprintRevisionID1=PCC-0050-2, LatestRevision=1
PL2 PL3: library part CMP-003-0004-2, "Pin header 10-pin 2.54mm female", Mfg. Part Number=DS1023-1*10S21
PL4: library part CMP-003-0002-2, "PCB terminal block, angled 90°; 5mm, 2-way, 1.5mm2", Mfg. Part Number=DG301-5.0-02P-11-00A(H)
PL5: library part CMP-003-0001-3, "CONN PWR JACK 2X5.5MM SOLDER", Mfg. Part Number=PJ-102AH
PL6: library part CMP-003-0003-3, "Pin header 4-pin 2.54mm male", Mfg. Part Number=DS1021-1*4SF1-1
PL7: library part CMP-003-0000-3, "CONN USB MICRO B RECPT SMT R/A", Mfg. Part Number=10118193-0001LF
Q1: library part CMP-014-0006-2, "MOSFET P-CH 60V 4A CPH6", Mfg. Part Number=CPH6354-TL-W
R1 R2 R4 R5 R6 R19: library part CMP-001-0029-3, "RES SMD 4.7K OHM 1% 1/16W 0402", Case/Package=0402, Mfg. Part Number=RC1005F472CS, Power=1/16W, Tolerance=1
R3 R7 R10 R20: library part CMP-001-0019-3, "RES SMD 10K OHM 1% 1/16W 0402", Case/Package=0402, Mfg. Part Number=RMCF0402FT10K0, Power="1/16 W", Tolerance="1 %"
R8 R9 R15 R17 R18: library part CMP-001-0027-3, "RES SMD 47K OHM 1% 1/16W 0402", Case/Package=0402, Mfg. Part Number=RMCF0402FT47K0, Power=1/16W, Tolerance=1%
R11 R16: library part CMP-001-0025-3, "RES SMD 1K OHM 1% 1/16W 0402", Case/Package=0402, Mfg. Part Number=CRG0402F1K0, Power=1/16W, Tolerance=1%
R12 R13: library part CMP-001-0039-2, "RES 0.15 OHM 1% 1/2W 1206", Case/Package=1206, Mfg. Part Number=RL1206FR-7W0R15L, Power=0.5W, Tolerance=1%, FootprintDescription1="Chip Resistor, 2-Leads, 1206, IPC Medium Density", FootprintName1=RES_1206, FootprintRevisionID1=RES_1206-1
R14: library part CMP-001-0026-3, "RES SMD 22K OHM 1% 1/16W 0402", Case/Package=0402, Mfg. Part Number=RMCF0402FT22K0, Power=1/16W, Tolerance=1%
SW1: library part CMP-013-0002-1, "Microswitch TACT; SPST-NO; Positions:2; 0.05A/12VDC;", Case/Package=-, Mfg. Part No.=TACTB-64K-F, Mount=SMD, Pins=4, RoHS=Yes
TP1 TP2 TP3: library part CMP-ROOT-0006-0.0, "Testpoint"
U1: library part CMP-00062-3, "IC SENSOR MAG ROTARY 12BIT 8SOIC", Mfg. Part Number=AS5600-ASOT
U2: library part CMP-011-0001-4, "IC MCU 8BIT 32KB FLASH 32TQFP", Case/Package=QFN-32, Mount=SMD, Pins=32, RoHS=Yes
U3: library part CMP-00060-4, "IC REG LINEAR 5V 800MA SOT223", Mfg. Part Number=AZ1117CH-5.0TRG1
U4: library part CMP-00031-4, "LDO Voltage Regulators Single 300mA"
U5: library part CMP-00063-3, "IC STEPPER MOTOR DRIVER 28QFN", Mfg. Part Number=TMC2208-LA-T
U6: library part CMP-00038-5, "IC BRIDGE USB TO UART 20QFN", Mfg. Part Number=CP2102N-A01-GQFN20
X1: library part CMP-015-0002-4, "CER RES 16.0000MHZ 15PF SMD", Case/Package=-, Mfg. Part Number=CSTCE16M0V53-R0, FootprintDescription1=CSTCE16M0V53-R0, FootprintName1=CSTCE16XTAL, FootprintRevisionID1=PCC-0038-1, Mount=SMD, Pins=3, RoHS=Yes

## Free pads (board coordinates)
  round 5 hole 3.1 unplated paste+0 mask+0.102: 1(36.4,36.399) 3(5.4,5.399)
  oval 0.9x1.6 on Top Paste: 4(22,2.149) 4(28.6,2.124)

## Via types
v1: diameter 0.6, hole 0.3, Top Layer to Bottom Layer, tented both sides, 352 vias
v2: diameter 0.6, hole 0.3, Top Layer to Bottom Layer, 18 vias
v3: diameter 0.6, hole 0.3, Top Layer to Bottom Layer, tented bottom, 13 vias
v4: diameter 0.6, hole 0.3, Top Layer to Bottom Layer, tented top, 4 vias

## Nets (pads, with @x,y where several pads share a name; then routed paths per layer and width w, separated by ;. In a path a pad name is that pad's centre, name@x,y a point inside that pad or via, vN(x,y) a via of type N, cw(c..) or ccw(c..) an arc to the next point about the centre after c; other vN are vias at no path point)
3V3: C11.2 C27.2 C28.2 D9.1 D10.1 PL3.9 R16.2 U4.5 U6.6 U6.7 | length 55.7
  Top Layer w0.254: v1(18.95,8.899) 18.95,8.498 20.049,7.399 v1(21.5,7.399) ; v1(27.75,6.224) 29.341,6.224 30.361,5.205 36.045,5.205 36.325,4.924 v1(37.375,4.924)
  Top Layer w0.3: v1(38.425,6.499) 38.785,6.859 D9.1@38.785,7.349 D10.1@38.785,8.874
  Top Layer w0.4: v1(13.7,12.274) 13.7,10.024 v1(14.425,9.299) 18,5.724 v1(18.275,5.724)
  Bottom Layer w0.25: v1(18.275,5.724) 18.964,5.724 19.943,6.703 19.943,8.622 19.666,8.899 v1(18.95,8.899)
  Bottom Layer w0.254: C11.2@13.44,13.024 C11.2@13.45,13.035 ; U6.7@17.75,9.149 17.975,8.924 ; U6.6@18.25,9.449 18.277,9.422 C28.2@18.277,8.019 C28.2@18.4,8.019 ; C28.2@18.275,7.894 C28.2@18.4,8.019 ; v1(18.95,8.899) 19.327,8.522 C27.2@19.327,8.019 C28.2@18.4,8.019 ; v1(21.5,7.399) 22.125,6.774 27.2,6.774 v1(27.75,6.224) ; v1(37.375,4.924) 38.425,5.974 v1(38.425,6.499)
  Bottom Layer w0.3: PL3.9@10.755,21.905 12.498,20.163 12.498,13.336 12.809,13.024 C11.2@13.44,13.024
  Bottom Layer w0.4: R16.2@13.7,9.299 v1(14.425,9.299) ; v1(13.7,12.274) 13.7,13.014 C11.2@13.69,13.024 13.69,14.314 U4.5@13.7,14.325
+5V: C1.2 C4.1 C5.2 C6.2 C9.2 C10.2 C12.2 C13.2 C21.2 D3.1 D8.2 PL3.8 R1.2 R2.2 R5.2 R6.2 R7.2 R10.2 R20.2 U1.1 U2.4 U2.18 U3.2 U4.1 U4.3 U5.9 U5.10 U5.15 | length 57.9
  Top Layer w0.2: C4.1@23.808,10.359 24.45,11.001 U2.4@24.45,11.999 ; U2.18@25.95,16.949 25.95,17.474 26.525,18.049 C5.2@26.525,18.489 C6.2@27.575,18.49
  Top Layer w0.3: v1(13.85,5.799) R20.2@13.85,6.749 ; v1(18.625,16.174) 19,15.799 R6.2@19.45,15.799 R5.2@19.45,14.974 ; v1@21.3,9.449 v1(21.225,9.374) 21.952,9.374 22.702,10.125 22.702,10.127 22.91,10.334 C4.1@23.75,10.334
  Top Layer w0.5: v1(3.925,10.649) 4.238,10.962 4.525,11.249 v1(4.55,11.249) ; v1(4,22.749) 4,22.924 R7.2@4.35,23.274 ; v1(4.55,10.049) v1(4.55,10.649) v1(4.55,11.249) ; D3.1@5.575,11.249 v1(4.55,11.249) ; v1(27.55,17.874) 27.55,18.465 C6.2@27.575,18.49
  Top Layer w0.6: v1@4.525,11.249 v1@3.95,11.249 ; v1(2.7,10.649) 3.012,10.337 v1@3.3,10.049 ; v1(2.7,10.649) v1@2.725,10.649 ; v1(2.7,10.649) v1(2.7,10.049) v1@3.3,10.049 ; v1(2.7,10.649) v1(2.7,11.249) v1(3.325,11.249) ; v1@2.725,10.649 v1(3.325,10.649) ; v1@2.725,10.649 v1(3.325,11.249) ; v1@3.3,10.049 v1(3.325,10.049) ; v1(3.325,10.049) v1(3.325,10.649) ; v1(3.325,10.049) v1(3.925,10.049) ; v1(3.325,10.649) v1(3.925,10.649) ; v1(3.325,10.649) v1(3.925,11.249) ; v1(3.325,10.649) 3.625,10.349 v1(3.925,10.049) ; v1(3.325,10.649) v1(3.325,11.249) ; v1(3.325,11.249) v1(3.925,11.249) ; v1(3.925,10.049) 4.238,10.362 ; v1(3.925,10.049) v1(3.925,10.649) ; v1(3.925,10.049) v1(4.55,10.049) 4.25,10.349 4.238,10.362 ; v1(3.925,10.649) v1@3.95,10.649 ; v1(3.925,10.649) v1(3.925,11.249) ; v1(3.925,11.249) v1@3.95,11.249 ; v1@3.95,10.649 4.237,10.362 ; v1@3.95,10.649 v1@4.525,10.649 ; v1@3.95,11.249 4.237,10.962 v1(4.55,10.649) v1@4.525,10.649 ; 4.238,10.362 v1@4.525,10.649
  Bottom Layer w0.2: U5.10@23.75,28.499 23.75,27.824 v1(23.975,27.599) 24.25,27.874 U5.9@24.25,28.499
  Bottom Layer w0.25: C21.2@19.735,29.299 19.76,29.324 U5.15@20.925,29.324
  Bottom Layer w0.3: v1(13.7,20.124) 13.7,17.025 13.7,16.224 13.95,15.974 15.35,15.974 15.6,16.225 U4.3@15.6,17.025
  Bottom Layer w0.5: v1(16.3,19.024) 16.96,19.024 C1.2@16.975,19.009 16.99,18.994 U1.1@18.5,18.994 ; R1.2@25.6,20.274 25.6,20.324 v1(26.175,20.899) 25.6,21.474 R2.2@25.6,21.524 ; R10.2@30.15,30.299 30.15,28.024 v1(30.175,27.999)
  Bottom Layer w0.6: U3.2@5.175,15.299 U3.2@5.56,14.914 ; v1(13.85,5.799) 15.225,5.799 D8.2@15.375,5.949 ; C21.2@19.735,29.299 19.735,27.389 v1(20.725,26.399)
  Bottom Layer w1.2: U3.2@5.175,15.299 U3.2@5.175,21.499
\R\S\T\: C29.2 PL3.10 R7.1 SW1.1 SW1.2 U2.29 | length 54.7
  Top Layer w0.2: SW1.2@6,14.449 SW1.1@6,20.649 6,21.674 5.25,22.424 R7.1@5.25,23.274 6.131,23.274 7.55,21.855 v1(7.55,19.424) ; v1(21.075,14.224) U2.29@22.225,14.224
  Bottom Layer w0.2: v1(7.55,19.424) 9.225,19.424 ; C29.2@13.7,10.564 9.835,10.564 9.225,11.174 9.225,19.424 ; v1(21.075,14.224) 20.375,13.524 18.75,13.524 16.75,15.524 13.614,15.524 12.9,16.238 12.9,22.3 PL3.10@10.755,24.445 10.59,24.445 9.225,23.08 9.225,19.424
A0: PL3.1 U2.22 | length 29.3
  Top Layer w0.2: PL3.1@10.755,1.585 12.7,1.585 13.032,1.917 13.032,8.845 12.555,9.322 12.555,13.185 16.039,16.669 18.292,16.669 19.249,17.627 21.473,17.627 v1(21.55,17.549) ; U2.22@23.95,16.949 23.957,16.956 v1(23.957,18.155)
  Bottom Layer w0.2: v1(21.55,17.549) 22.2,17.549 22.625,17.124 23.575,17.124 23.957,17.506 v1(23.957,18.155)
A1: PL3.2 U2.23 | length 25.4
  Top Layer w0.2: PL3.2@10.755,4.125 12.451,4.125 12.68,4.354 12.68,8.699 12.202,9.176 12.202,13.331 15.893,17.022 18.146,17.022 19.448,18.324 v1(21.55,18.324) ; v1(23.3,17.724) 23.45,17.574 U2.23@23.45,16.949
  Bottom Layer w0.2: v1(21.55,18.324) 21.975,18.324 22.575,17.724 v1(23.3,17.724)
A2: PL3.3 U2.24 | length 23.5
  Top Layer w0.2: PL3.3@10.755,6.665 12.116,6.665 12.327,6.877 12.327,8.553 11.85,9.03 11.85,13.477 15.747,17.374 18,17.374 19.725,19.099 v1(21.55,19.099) ; v1(22.8,18.292) 22.748,18.239 22.748,17.495 22.95,17.293 U2.24@22.95,16.949
  Bottom Layer w0.2: v1(21.55,19.099) 21.975,19.099 22.782,18.292 v1(22.8,18.292)
A3/SDA: PL2.9 R6.1 U2.27 | length 35.8
  Top Layer w0.2: R6.1@20.35,15.799 v1(20.925,15.799) 21.175,15.799 21.75,15.224 U2.27@22.225,15.224
  Bottom Layer w0.2: v1(20.925,15.799) 21.675,15.799 22.395,15.079 22.395,12.67 22.835,12.231 22.835,10.241 23.272,9.804 28.805,9.804 29.275,10.274 34.65,10.274 35.273,10.897 35.273,15.925 33.223,17.975 33.223,21.553 32.871,21.905 PL2.9@31.075,21.905
A4/SCL: PL2.8 R5.1 U2.28 | length 35.1
  Top Layer w0.2: R5.1@20.35,14.974 v1(20.925,14.974) 21.325,14.974 21.575,14.724 U2.28@22.225,14.724
  Bottom Layer w0.2: v1(20.925,14.974) 20.275,14.974 20,15.249 20,15.934 20.44,16.374 21.598,16.374 22.748,15.225 22.748,12.816 23.187,12.377 23.187,10.387 23.418,10.156 28.659,10.156 29.129,10.627 34.504,10.627 34.92,11.043 34.92,15.779 32.87,17.829 32.87,19.054 32.559,19.365 PL2.8@31.075,19.365
AUX1/A5: PL1.1 U2.19 | length 19.2
  Top Layer w0.2: U2.19@25.45,16.949 25.45,17.374 25.575,17.499 v1(25.575,18.074) ; v1(34.3,15.499) 35.175,15.499 35.91,16.234 PL1.1@36.9,16.234
  Bottom Layer w0.2: v1(25.575,18.074) 25.575,17.524 25.875,17.224 26.472,17.224 27.5,16.196 27.5,13.435 27.861,13.074 29.379,13.074 29.725,13.42 29.725,15.099 30.399,15.773 31.511,15.773 31.712,15.974 33.825,15.974 v1(34.3,15.499)
AUX2: PL1.2 U2.10 | length 23.6
  Top Layer w0.2: U2.10@27.175,13.224 28.227,13.224 29.245,12.206 29.245,10.929 29.475,10.699 29.475,8.799 29.898,8.377 29.904,8.377 30.227,8.053 30.227,8.047 30.55,7.724 32.2,7.724 33.735,9.259 33.735,18.109 34.4,18.774 PL1.2@36.9,18.774
AUX3: PL1.3 U2.13 | length 22.4
  Top Layer w0.2: U2.13@27.175,14.724 28.977,14.724 29.17,14.531 29.17,13.277 29.95,12.498 29.95,11.251 30.602,10.599 32.6,10.599 33.03,11.029 33.03,19.004 v1(34.15,20.124)
  Bottom Layer w0.2: v1(34.15,20.124) 34.15,20.849 34.615,21.314 PL1.3@36.9,21.314
CLKIN: U2.12 U5.13 | length 20.5
  Top Layer w0.2: U2.12@27.175,14.224 28.525,14.224 v1(28.6,14.149)
  Bottom Layer w0.2: U5.13@22.25,28.499 22.25,26.424 ccw(c23.625,26.424) 23.625,25.049 26.035,25.049 cw(c26.035,22.484) 28.6,22.484 v1(28.6,14.149)
D0/RXD: PL2.1 R19.2 U2.30 | length 33
  Top Layer w0.2: U2.30@22.225,13.724 21.602,13.724 21.55,13.672 19.252,13.672 18.975,13.949 v1(17.525,13.949) 15.505,13.949 15.1,13.544 15.1,12.493 15.423,12.171 15.423,10.247 16.598,9.072 17.329,9.072 18.827,7.573 18.827,4.292 19.825,3.294 20.775,3.294 20.83,3.349 29.311,3.349 PL2.1@31.075,1.585
  Bottom Layer w0.2: R19.2@16.75,14.274 17.2,14.274 v1(17.525,13.949)
D1/TXD: PL2.2 U2.31 U6.17 | length 31.1
  Top Layer w0.2: U2.31@22.225,13.224 v1(15.775,13.224) 15.775,10.393 16.744,9.424 17.475,9.424 19.18,7.719 19.18,4.438 19.971,3.647 20.629,3.647 20.684,3.702 29.422,3.702 29.846,4.125 PL2.2@31.075,4.125
  Bottom Layer w0.2: v1(15.775,13.224) 16.25,12.749 U6.17@16.25,12.249 ; PL2.2@30.744,3.904 30.799,3.849 PL2.2@31.075,4.125
D2: D1.1 PL2.3 U2.1 | length 23.6
  Top Layer w0.2: v1(21.825,11.749) 22.075,11.999 U2.1@22.95,11.999 ; PL2.3@31.075,6.665 PL2.3@31.639,6.665 ; PL2.3@31.713,6.665 PL2.3@31.639,6.665 ; D1.1@38.785,10.399 38.785,9.884 38.525,9.624 34.598,9.624 PL2.3@31.639,6.665
  Bottom Layer w0.2: v1(21.825,11.749) 21.902,11.672 21.902,10.17 22.13,9.943 22.13,9.118 22.901,8.347 23.579,8.347 23.581,8.349 28.137,8.349 29.821,6.665 PL2.3@31.075,6.665
D3: PL2.4 U2.32 | length 14
  Top Layer w0.2: v1(20.95,12.524) 21.475,12.524 21.675,12.724 U2.32@22.225,12.724
  Bottom Layer w0.2: v1(20.95,12.524) 22.043,12.524 22.482,12.085 22.482,10.095 23.126,9.452 28.923,9.452 29.169,9.205 PL2.4@31.075,9.205
D4/MOSI0: PL2.5 U2.15 | length 12.5
  Top Layer w0.2: U2.15@27.175,15.724 28.973,15.724 29.875,14.823 29.875,13.823 30.546,13.152 31.704,13.152 32.325,13.773 32.325,15.024 v1(32.125,15.224)
  Bottom Layer w0.2: PL2.5@31.075,12.098 31.075,12.124 32.595,13.644 32.595,14.755 v1(32.125,15.224)
D5/MISO0: PL2.6 U2.16 | length 4.7
  Top Layer w0.2: U2.16@27.175,16.224 29.136,16.224 PL2.6@31.075,14.285
D6/SCK0: PL2.7 U2.17 | length 4.7
  Top Layer w0.2: U2.17@26.45,16.949 26.475,16.924 29.1,16.924 29.199,16.825 PL2.7@31.075,16.825